# EAGLE board EndEffector (EAGLE 6.5.0)
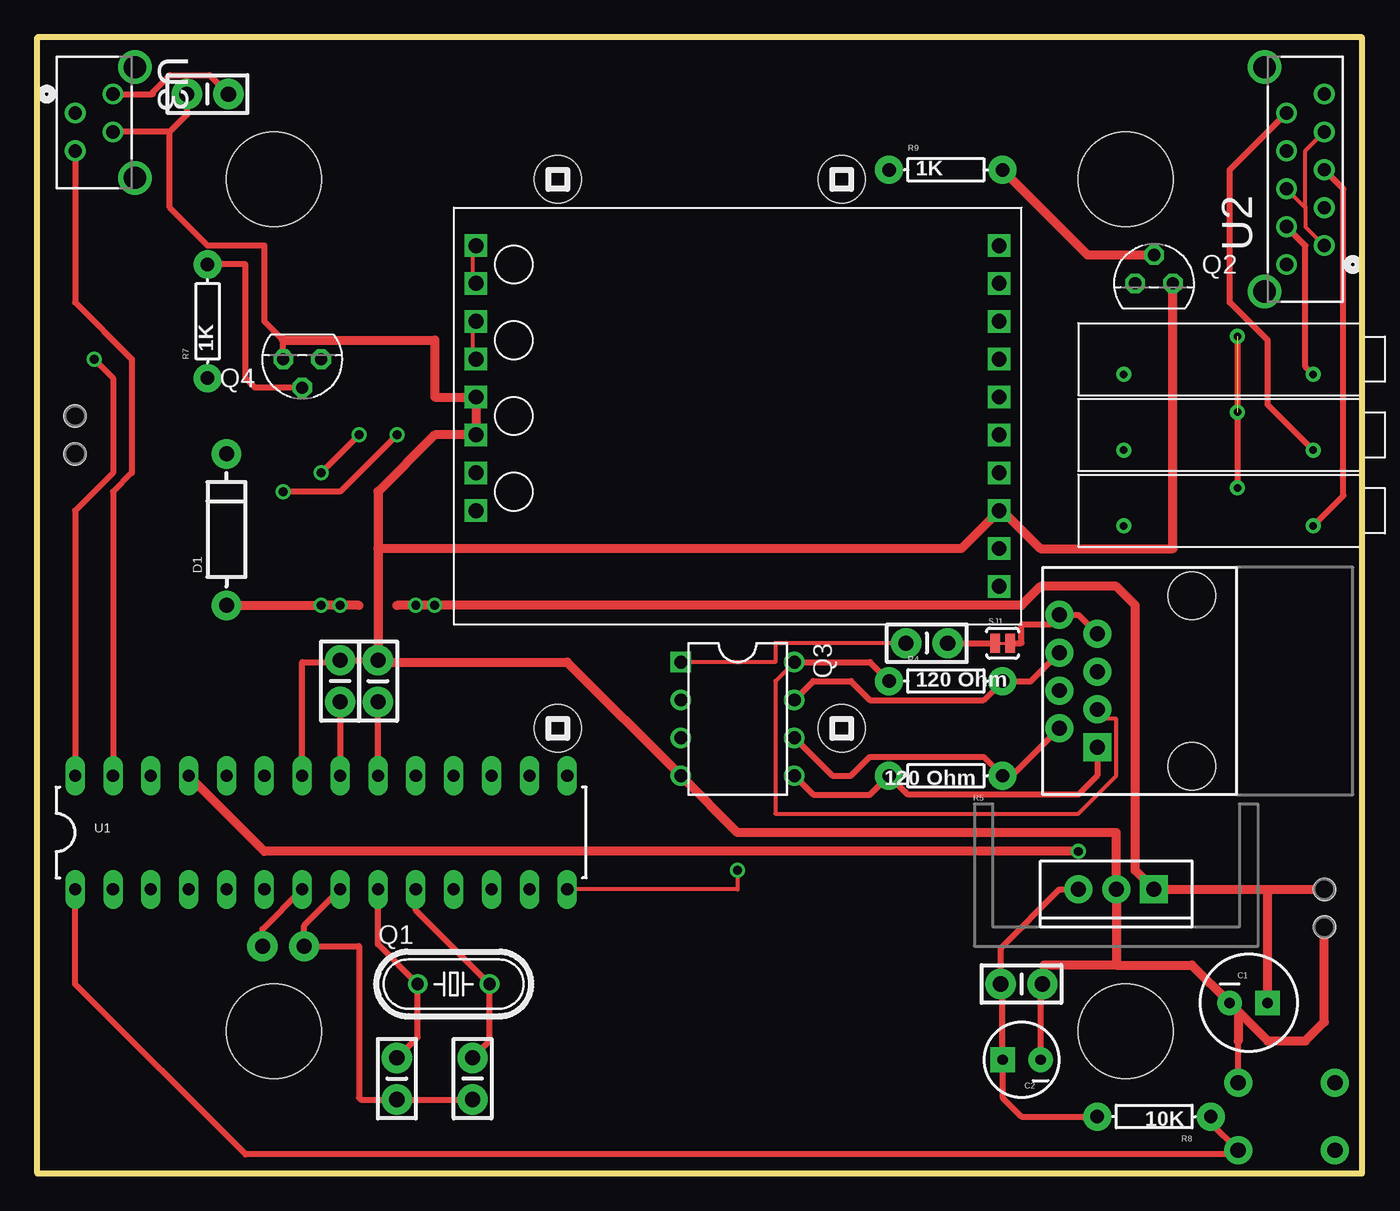
[diagram p0: board, top side]
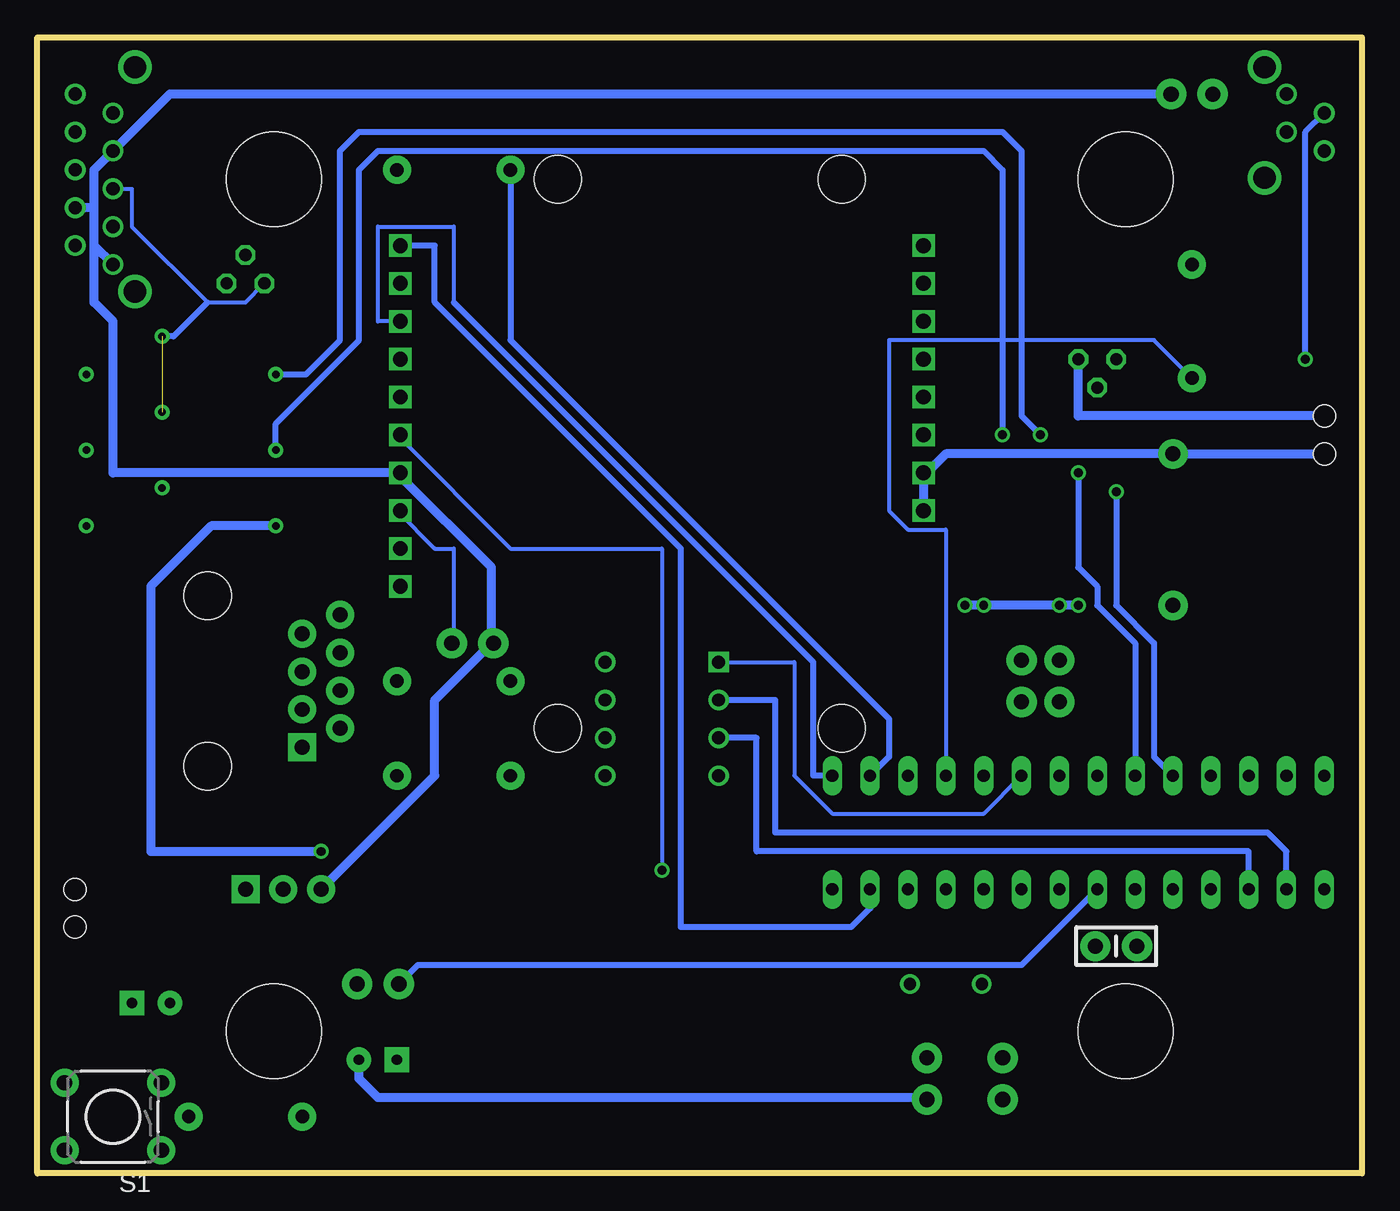
[diagram p1: board, bottom side, seen from below]

Size 88.9 x 76.2 mm. Coordinates in mm from the lower left corner, seen from the top.
Outline: 0,0 0,76.2 88.9,76.2 88.9,0 0,0
Copper layers (1*16): Top 0.035mm / dielectric 1.5mm / Bottom 0.035mm
Design rules "default": minimum track width 10mil, minimum drill 24mil, track to track 8mil, track to pad 8mil, pad to pad 8mil, via to via 8mil, smd to smd 8mil, copper to edge 40mil, drill to drill 8mil, minimum pad ring 10mil, minimum via ring 8mil, stop-mask expansion 4mil, vias tented up to drill 0mil, thermal gap 10mil
Holes 6.35 mm at 73.03,66.67 15.88,66.67 15.88,9.53 73.03,9.53
Holes 3.17 mm at 53.98,29.84 53.98,66.67 34.92,66.67 34.92,29.84

## Footprints (pad centres in the part's own frame; a part is rotated, then mirrored left to right if it is on the bottom)
CPOL-RADIAL-100UF-25V = drill 0.7 pad 1.651 square: 1 1.27,0 | drill 0.7 pad 1.651: 2 -1.27,0
CPOL-RADIAL-10UF-25V = drill 0.7 pad 1.651 square: 1 1.27,0 | drill 0.7 pad 1.651: 2 -1.27,0
CAP-PTH-SMALL-KIT = drill 1.016 pad 2.032: 1 -1.397,0; 2 1.397,0
DIODE-1N4001 = drill 1 pad 1.981: A -5.08,0; C 5.08,0
TO220-IGO = drill 1 pad 1.88: GND 0,0; OUT 2.54,0 | drill 1 pad 1.88 square: IN -2.54,0
1X02_PP_HOLES_ONLY = drill 0.889 pad 0.813: 1 0,0; 2 2.54,0 | hole 1.473: 0,0; 2.54,0
HC49/S = drill 0.813: 1 -2.413,0; 2 2.413,0
TO92 = drill 0.813 octagon: 1 1.27,0; 2 0,1.905; 3 -1.27,0
DIP8 = drill 0.864 square: 1 -3.81,-3.81 | drill 0.864: 2 -1.27,-3.81; 3 1.27,-3.81; 4 3.81,-3.81; 5 3.81,3.81; 6 1.27,3.81; 7 -1.27,3.81; 8 -3.81,3.81
AXIAL-0.3 = drill 0.9 pad 1.88: P$1 -3.81,0; P$2 3.81,0
TACTILE-PTH = drill 1.016 pad 1.88: 1 -3.251,2.261; 2 3.251,2.261; 3 -3.251,-2.261; 4 3.251,-2.261
SJ_2S-TRACE = smd 0.635 x 1.27: 1 -0.508,0; 2 0.508,0
DIL28-3 = drill 0.813 long: 1 -16.51,-3.81; 2 -13.97,-3.81; 3 -11.43,-3.81; 4 -8.89,-3.81; 5 -6.35,-3.81; 6 -3.81,-3.81; 7 -1.27,-3.81; 8 1.27,-3.81; 9 3.81,-3.81; 10 6.35,-3.81; 11 8.89,-3.81; 12 11.43,-3.81; 13 13.97,-3.81; 14 16.51,-3.81; 15 16.51,3.81; 16 13.97,3.81; 17 11.43,3.81; 18 8.89,3.81; 19 6.35,3.81; 20 3.81,3.81; 21 1.27,3.81; 22 -1.27,3.81; 23 -3.81,3.81; 24 -6.35,3.81; 25 -8.89,3.81; 26 -11.43,3.81; 27 -13.97,3.81; 28 -16.51,3.81
MOLEX_90325-0010 = drill 0.889: 1 0,5.08; 2 1.27,2.54; 3 2.54,5.08; 4 3.81,2.54; 5 5.08,5.08; 6 6.35,2.54; 7 7.62,5.08; 8 8.89,2.54; 9 10.16,5.08; 10 11.43,2.54 | drill 1.499: 11 -1.803,6.553; 12 13.233,6.553
MOLEX_90325-0004 = drill 0.889: 1 0,5.08; 2 1.27,2.54; 3 2.54,5.08; 4 3.81,2.54 | drill 1.499: 5 -1.803,6.553; 6 5.613,6.553
RJ45-8 = drill 1 pad 1.88 square: 1 -4.445,6.35 | drill 1 pad 1.88: 2 -3.175,8.89; 3 -1.905,6.35; 4 -0.635,8.89; 5 0.635,6.35; 6 1.905,8.89; 7 3.175,6.35; 8 4.445,8.89 | hole 3.2: -5.715,0; 5.715,0
BOURNS30006_TRIMPOT = drill 0.5: 1 -16,-1.015; 2 -8.38,1.525; 3 -3.3,-1.015
VNH5019_CARRIER = drill 1 square: CS 36.6,-10.16; ENA/DIAGA 36.6,-5.08; ENB/DIAGB 36.6,-12.7; GND 36.6,-20.32; GND_1 1.5,-12.7; GND_2 1.5,-15.24; GND_3 36.6,-25.4; INA 36.6,-2.54; INB 36.6,-15.24; OUTA_1 1.5,-2.54; OUTA_2 1.5,-5.08; OUTB_1 1.5,-7.62; OUTB_2 1.5,-10.16; PWM 36.6,-7.62; VDD 36.6,-17.78; VIN_MOT_1 1.5,-17.78; VIN_MOT_2 1.5,-20.32; VOUT 36.6,-22.86

## Placement (x,y rotation side)
C1  100uF  [CPOL-RADIAL-100UF-25V]  81.28,11.43 0 top
C2  10uF  [CPOL-RADIAL-10UF-25V]  66.04,7.62 180 top
C3  .1uF  [CAP-PTH-SMALL-KIT]  22.86,33.02 90 top
C4  22pF  [CAP-PTH-SMALL-KIT]  24.13,6.35 90 top
C5  22pF  [CAP-PTH-SMALL-KIT]  29.21,6.35 270 top
C6  .01uF  [CAP-PTH-SMALL-KIT]  11.43,72.39 180 top
C7  .01uF  [CAP-PTH-SMALL-KIT]  66.04,12.7 0 top
C8  .01uF  [CAP-PTH-SMALL-KIT]  20.32,33.02 270 top
C9  .1uF  [CAP-PTH-SMALL-KIT]  16.51,15.24 180 bottom
C10  .1uF  [CAP-PTH-SMALL-KIT]  59.69,35.56 0 top
D1  [DIODE-1N4001]  12.7,43.18 90 top
IC1  [TO220-IGO]  72.39,19.05 180 top
JP1  M02  [1X02_PP_HOLES_ONLY]  2.54,48.26 90 top
JP2  M02  [1X02_PP_HOLES_ONLY]  86.36,16.51 90 top
Q1  16MHZ  [HC49/S]  27.94,12.7 0 top
Q2  BC517  [TO92]  74.93,59.69 0 top
Q3  Q_LTC490  [DIP8]  46.99,30.48 270 top
Q4  BC517  [TO92]  17.78,54.61 180 top
R4  120 Ohm  [AXIAL-0.3]  60.96,33.02 0 top
R5  120 Ohm  [AXIAL-0.3]  60.96,26.67 180 top
R7  1K  [AXIAL-0.3]  11.43,57.15 90 top
R8  10K  [AXIAL-0.3]  74.93,3.81 180 top
R9  1K  [AXIAL-0.3]  60.96,67.31 0 top
S1  SWITCH-MOMENTARY-2PTH  [TACTILE-PTH]  83.82,3.81 180 bottom
SJ1  SOLDERJUMPERTRACE  [SJ_2S-TRACE]  64.77,35.56 0 top
U1  ATMEGA328P_PDIP  [DIL28-3]  19.05,22.86 0 top
U2  90325-0010  [MOLEX_90325-0010]  88.9,60.96 90 top
U3  90325-0004  [MOLEX_90325-0004]  0,72.39 270 top
U$1  RJ45-8PTH  [RJ45-8]  77.47,33.02 90 top
U$2  [BOURNS30006_TRIMPOT]  88.9,44.45 0 top
U$4  [BOURNS30006_TRIMPOT]  88.9,54.61 0 top
U$5  [BOURNS30006_TRIMPOT]  88.9,49.53 0 top
U$6  VNH5019_POLOLU_CARRIER  [VNH5019_CARRIER]  27.94,64.77 0 top

## Library data of the parts
C1-C10 = SparkFun-Capacitors
D1 = SparkFun-DiscreteSemi
IC1 = SparkFun-PowerIC
JP1 JP2 U$1 = SparkFun-Connectors
Q1 = crystal; OC_FARNELL: 1667008; OC_NEWARK: unknown
Q2 Q4 = transistor-npn
Q3 = PCB0M1
R4 R5 R7-R9 SJ1 = SparkFun-Passives
S1 = SparkFun-Electromechanical
U1 = SparkFun-DigitalIC
U2 = Molex_By_element14_Batch_1; MPN: 90325-0010; OC_FARNELL: 673249; OC_NEWARK: 46WX961; PACKAGE: HEADER, 1.27MM, 10 WAY; SUPPLIER: Molex
U3 = Molex_By_element14_Batch_1; MPN: 90325-0004; OC_FARNELL: 673213; OC_NEWARK: 46WX958; PACKAGE: HEADER, 1.27MM, 4 WAY; SUPPLIER: Molex
U$2 U$4-U$6 = SampleReturnParts

## Nets
5V+: C2.1 C3.1 C6.1 C7.1 C9.1 C10.1 IC1.OUT Q3.1 R8.P$2 U1.7 U1.20 U2.1 U2.4 U2.7 U3.1 U$6.VDD
12V+: D1.C JP1.1 U$6.VIN_MOT_1 U$6.VIN_MOT_2
ADC0: U1.23 U$4.1
ADC1: U1.24 U$5.1
ADC2: U1.25 U$2.1
AMMONIA: U2.6 U$2.3
GAS_CTRL: R9.P$1 U1.16
GAS_GND: Q2.3 U2.2 U2.5 U2.8 U$2.2 U$4.2 U$5.2
GND: C1.2 C2.2 C3.2 C4.1 C5.2 C6.2 C7.2 C8.1 C9.2 C10.2 IC1.GND JP2.1 Q2.1 Q3.4 Q4.1 S1.3 SJ1.1 U1.8 U1.22 U3.3 U$6.GND U$6.GND_1 U$6.GND_2
HEAT_CTRL: R7.P$1 U1.18
HYDROGEN: U2.9 U$5.3
IR_SCL: U1.28 U3.2
IR_SDA: U1.27 U3.4
METHANE: U2.3 U$4.3
MOT_INA: U1.13 U$6.INA
MOT_INB: U1.14 U$6.INB
MOT_PWM: U1.15 U$6.PWM
N$1: JP1.2 Q4.3
N$2: Q2.2 R9.P$2
N$3: U$6.OUTA_1 U$6.OUTA_2
N$4: C5.1 Q1.2 U1.10
N$5: Q3.5 R5.P$2 U$1.1
N$7: C4.2 Q1.1 U1.9
N$8: SJ1.2 U$1.7 U$1.8
N$9: Q3.6 R5.P$1 U$1.2
N$10: Q3.7 R4.P$2 U$1.6
N$11: Q3.8 R4.P$1 U$1.3
N$13: R8.P$1 S1.1 U1.1
N$23: Q4.2 R7.P$2
N$27: U$6.OUTB_1 U$6.OUTB_2
N$28: C8.2 U1.21
RXD: Q3.2 U1.2
TXD: Q3.3 U1.3
VCC: C1.1 D1.A IC1.IN JP2.2

## Tracks (layer width: path | path; a pad name or v marks a point on that pad's centre or on a via)
5V+
  Top 0.254: Q3.1 49.53,34.29 49.53,35.56 C10.1 58.42,35.56
  Top 0.406: C9.1 15.11,16.38 U1.7 | U1.20 C3.1 | U3.1 7.75,72.39 7.75,72.52 8.89,73.66 11.56,73.66 C6.1 | R8.P$2 66.04,3.81 64.77,5.08 C2.1 64.77,12.57 C7.1 64.64,15.11 68.58,19.05 IC1.OUT
  Bottom 0.254: 12.7,72.39 C6.1 | U1.20 25.4,24.13 35.56,24.13 38.1,26.67 38.1,34.29 Q3.1 | 64.77,12.7 C7.1
  Bottom 0.406: U1.7 22.86,13.97 63.37,13.97 C7.1
  Bottom 0.61: IC1.OUT 62.23,26.67 62.23,31.75 58.42,35.56 C10.1 58.42,35.69 58.42,40.64 64.54,46.76 U$6.VDD 83.82,46.99 83.82,57.15 85.09,58.42 85.09,62.23 | 85.09,62.23 85.09,64.77 | 85.09,64.77 85.09,67.31 U2.7 80.01,72.39 C6.1 | 85.09,62.23 U2.1 | 85.09,64.77 U2.4
12V+
  Bottom 0.61: JP1.1 D1.C 27.94,48.26 29.21,46.99 U$6.VIN_MOT_1 U$6.VIN_MOT_2
ADC0  (via drill 0.6)
  Top 0.406: v21.59,49.53 v19.05,46.99
  Bottom 0.406: U$4.1 70.86,53.59 68.58,55.88 68.58,68.58 67.31,69.85 24.13,69.85 22.86,68.58 22.86,50.8 v21.59,49.53 | v19.05,46.99 19.05,40.64 17.78,39.37 17.78,38.1 15.24,35.56 U1.23
ADC1  (via drill 0.6)
  Top 0.406: v24.13,49.53 20.32,45.72 v16.51,45.72
  Bottom 0.406: U$5.1 72.9,50.29 67.31,55.88 67.31,67.31 66.04,68.58 25.4,68.58 24.13,67.31 v24.13,49.53 | v16.51,45.72 16.51,38.1 13.97,35.56 13.97,27.94 U1.24
ADC2  (via drill 0.6)
  Top 0.61: v69.85,21.59 15.24,21.59 U1.25
  Bottom 0.61: U$2.1 77.22,43.44 81.28,39.37 81.28,21.59 v69.85,21.59
AMMONIA
  Top 0.406: U$2.3 87.63,45.47 87.63,66.04 U2.6
GAS_CTRL
  Bottom 0.406: R9.P$1 57.15,55.88 31.75,30.48 31.75,27.94 U1.16
GAS_GND  (1 unrouted)
  Top 0.254: U2.2 85.09,63.5 85.09,64.77 | U2.5 85.09,64.77 | U2.8 85.09,68.58 85.09,64.77
  Top 0.406: U$4.2 U$2.2
  Bottom 0.254: Q2.3 74.93,58.42 77.47,58.42 82.55,63.5 82.55,66.04 U2.5
  Bottom 0.406: 77.47,58.42 79.75,56.13 U$4.2
GND  (via drill 0.6)
  Top 0.254: 64.77,44.45 U$6.GND
  Top 0.406: S1.3 80.57,8.89 | 67.56,13.97 67.44,13.84 C7.2 67.31,12.57 C2.2 | U1.8 17.91,16.64 C9.2 21.59,15.24 21.59,5.08 21.72,4.95 C4.1 C5.2 v29.21,5.08 | U1.22 17.78,34.29 20.19,34.29 C8.1 C3.2 | 8.89,69.85 8.89,64.77 11.43,62.23 15.24,62.23 15.24,57.15 16.51,55.88 Q4.1 | 8.89,69.85 U3.3 | C6.2 10.03,70.99 8.89,69.85 | 60.96,35.56 C10.2 SJ1.1
  Top 0.61: 16.51,55.88 26.67,55.88 26.67,52.07 U$6.GND_1 U$6.GND_2 26.67,49.53 22.86,45.72 22.86,41.91 | 22.86,41.91 C3.2 22.99,34.29 35.56,34.29 Q3.4 46.99,22.86 72.39,22.86 IC1.GND 72.39,13.97 | 72.39,13.97 67.56,13.97 | 72.39,13.97 77.47,13.97 C1.2 | C1.2 80.57,10.87 80.57,8.89 | C1.2 82.55,8.89 85.09,8.89 86.36,10.16 JP2.1 | U$6.GND 62,41.91 22.86,41.91 | 64.77,44.45 67.31,41.91 76.2,41.91 Q2.1
  Bottom 0.254: C10.2 60.96,35.56 60.96,41.91 62.23,41.91 64.77,44.45 U$6.GND
  Bottom 0.61: v29.21,5.08 66.04,5.08 67.31,6.35 C2.2
HEAT_CTRL
  Bottom 0.254: U1.18 27.94,43.18 30.48,43.18 31.75,44.45 31.75,55.88 13.97,55.88 R7.P$1
HYDROGEN
  Top 0.406: U$5.3 82.55,51.56 82.55,55.88 80.01,58.42 80.01,67.31 U2.9
IR_SCL  (via drill 0.6)
  Top 0.406: U1.28 2.54,44.45 5.08,46.99 5.08,53.34 v3.81,54.61
  Bottom 0.406: v3.81,54.61 3.81,69.85 U3.2
IR_SDA
  Top 0.406: U3.4 2.54,58.42 6.35,54.61 6.35,46.99 5.08,45.72 U1.27
METHANE
  Top 0.406: U$4.3 85.09,54.1 85.09,62.23 U2.3
MOT_INA
  Bottom 0.406: U1.13 33.02,17.78 34.29,16.51 45.72,16.51 45.72,41.91 62.23,58.42 62.23,62.23 U$6.INA
MOT_INB  (via drill 0.61)
  Top 0.254: U1.14 46.99,19.05 v46.99,20.32
  Bottom 0.254: v46.99,20.32 46.99,41.91 57.15,41.91 64.77,49.53 U$6.INB
MOT_PWM
  Bottom 0.254: 60.96,58.42 60.96,63.5 66.04,63.5 66.04,57.15 U$6.PWM
  Bottom 0.406: U1.15 36.83,26.67 36.83,34.29 60.96,58.42
N$1
  Bottom 0.61: JP1.2 19.05,50.8 Q4.3
N$2
  Top 0.61: Q2.2 70.48,61.59 R9.P$2
N$3
  Top 0.254: U$6.OUTA_2 29.21,59.69 29.21,62.23 U$6.OUTA_1
N$4
  Top 0.406: C5.1 30.35,8.89 Q1.2 25.4,17.65 U1.10
N$5
  Top 0.406: U$1.1 71.12,26.67 69.85,25.4 58.42,25.4 R5.P$2 55.88,25.4 52.07,25.4 Q3.5
N$6  (via drill 0.6)
  other vias: 3.81,54.61
N$7
  Top 0.254: C4.2 24.13,7.62 25.4,8.89 25.34,8.95
  Top 0.406: 24.26,7.87 25.34,8.95 25.53,9.14 Q1.1 22.86,15.37 U1.9
N$8
  Top 0.406: SJ1.2 66.04,35.56 66.04,36.83 67.94,36.83 U$1.8 69.85,37.47 U$1.7
N$9
  Top 0.406: Q3.6 53.34,26.67 54.61,26.67 55.88,27.94 63.5,27.94 R5.P$1 65.41,26.67 U$1.2
N$10
  Top 0.406: Q3.7 52.07,33.02 54.61,33.02 55.88,31.75 63.5,31.75 R4.P$2 66.67,33.02 U$1.6
N$11
  Top 0.254: Q3.8 49.53,33.02 49.53,24.13 69.85,24.13 72.39,26.67 72.39,30.48 71.12,30.48 U$1.3
  Top 0.406: Q3.8 55.88,34.29 R4.P$1
N$13
  Top 0.406: R8.P$1 78.74,3.38 S1.1 80.29,1.27 13.97,1.27 2.54,12.7 U1.1
N$23
  Top 0.406: Q4.2 14.61,52.7 13.97,53.34 13.97,60.96 R7.P$2
N$27
  Top 0.254: U$6.OUTB_2 29.21,54.61 29.21,57.15 U$6.OUTB_1
N$28
  Top 0.406: C8.2 U1.21
RXD
  Bottom 0.406: U1.2 5.08,21.59 6.35,22.86 39.37,22.86 39.37,31.75 Q3.2
TXD
  Bottom 0.406: U1.3 7.62,21.59 40.64,21.59 40.64,29.21 Q3.3
VCC  (via drill 0.6)
  Top 0.61: 82.55,19.05 IC1.IN 73.66,20.32 73.66,38.1 72.39,39.37 67.31,39.37 66.04,38.1 v26.67,38.1 v25.4,38.1 24.13,38.1 | 82.55,19.05 JP2.2 | C1.1 82.55,19.05 | D1.A v19.05,38.1 v20.32,38.1 21.59,38.1
  Bottom 0.61: v19.05,38.1 v20.32,38.1 v25.4,38.1 v26.67,38.1